# EAGLE board OOBD - BTM182-BTM222 - V5 - EuroPCB (EAGLE 5.11), part 1 of 3
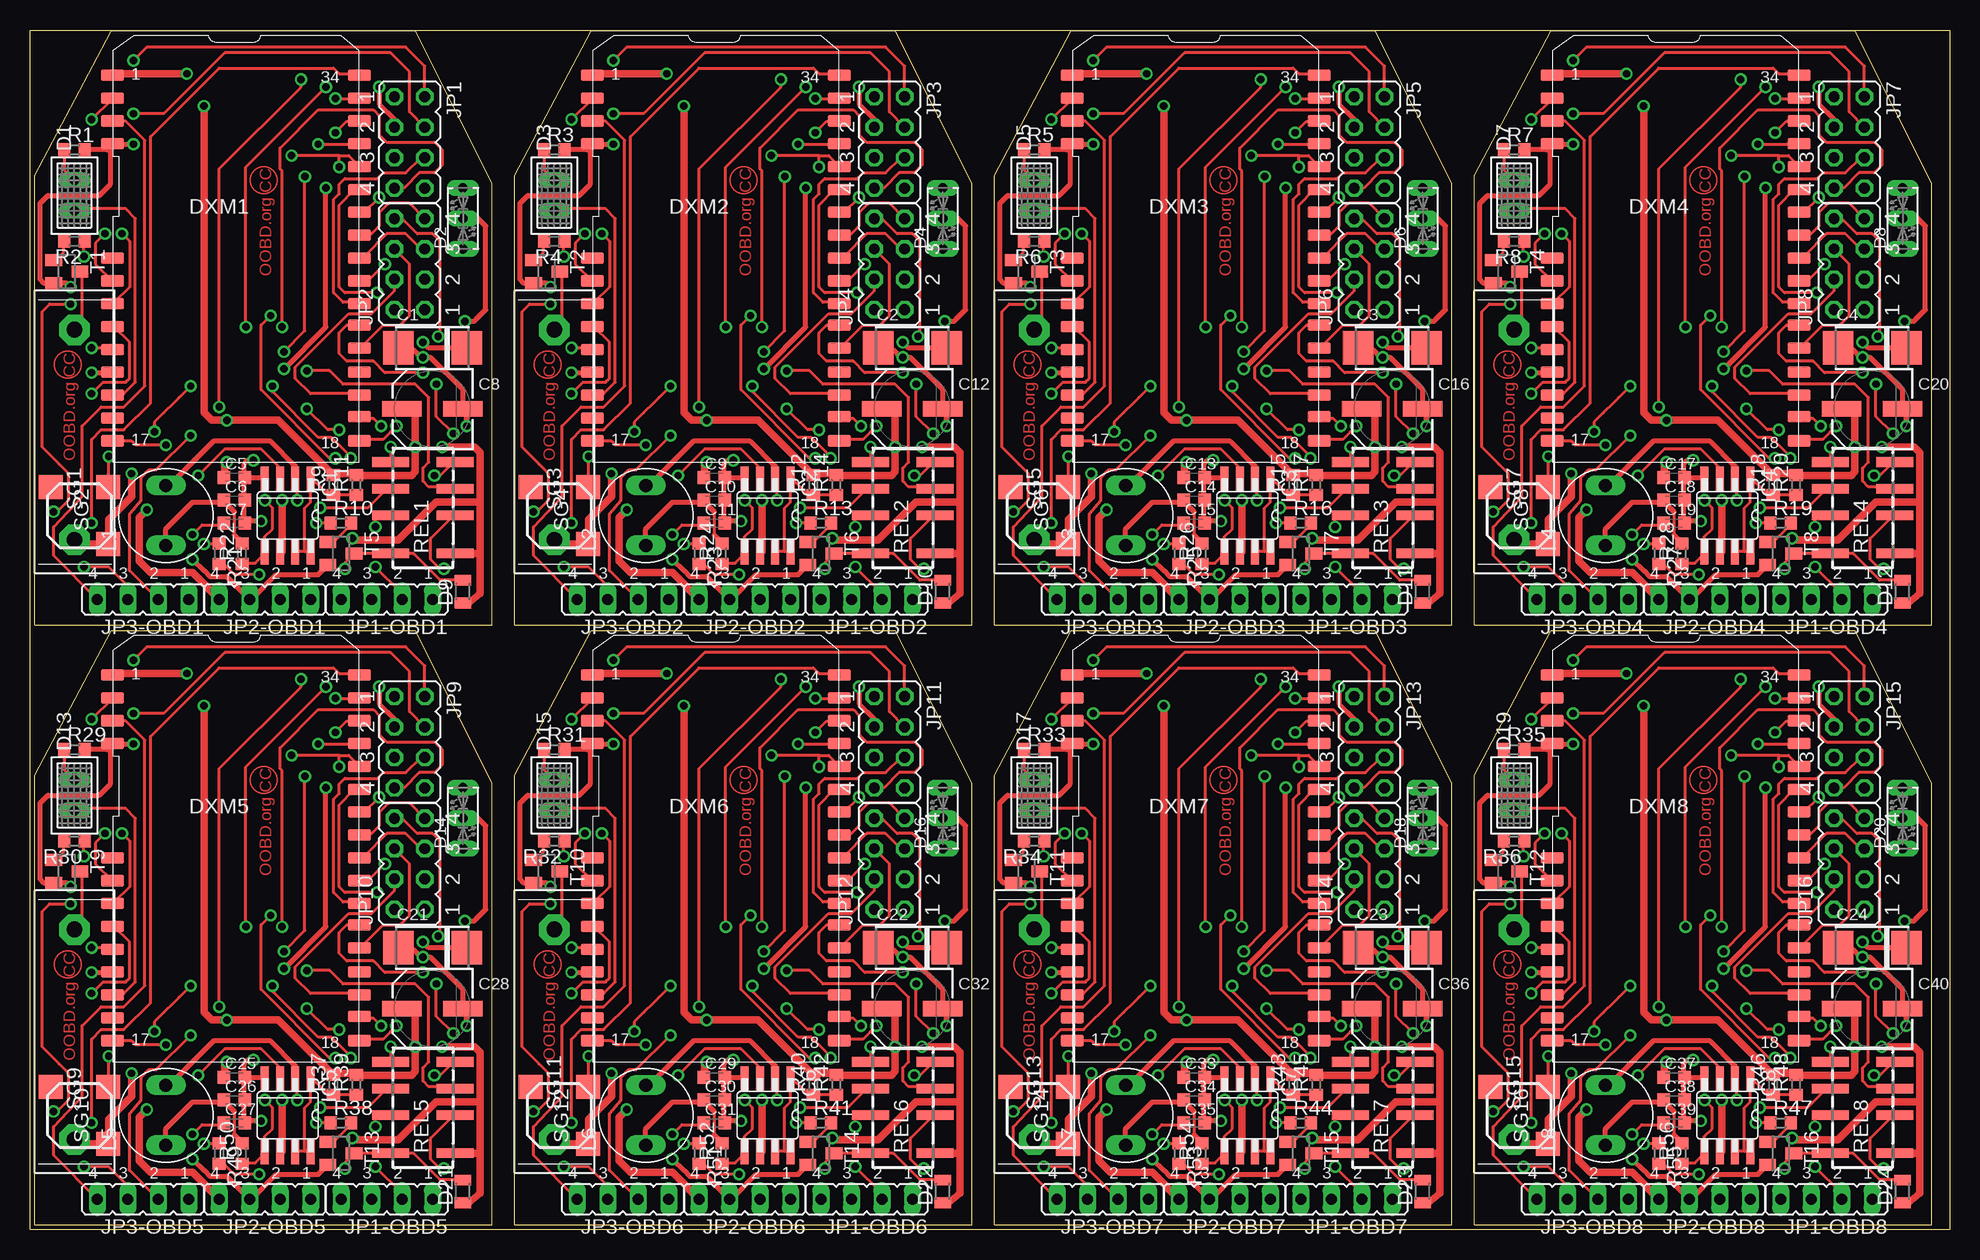
[diagram p0: board, top side]
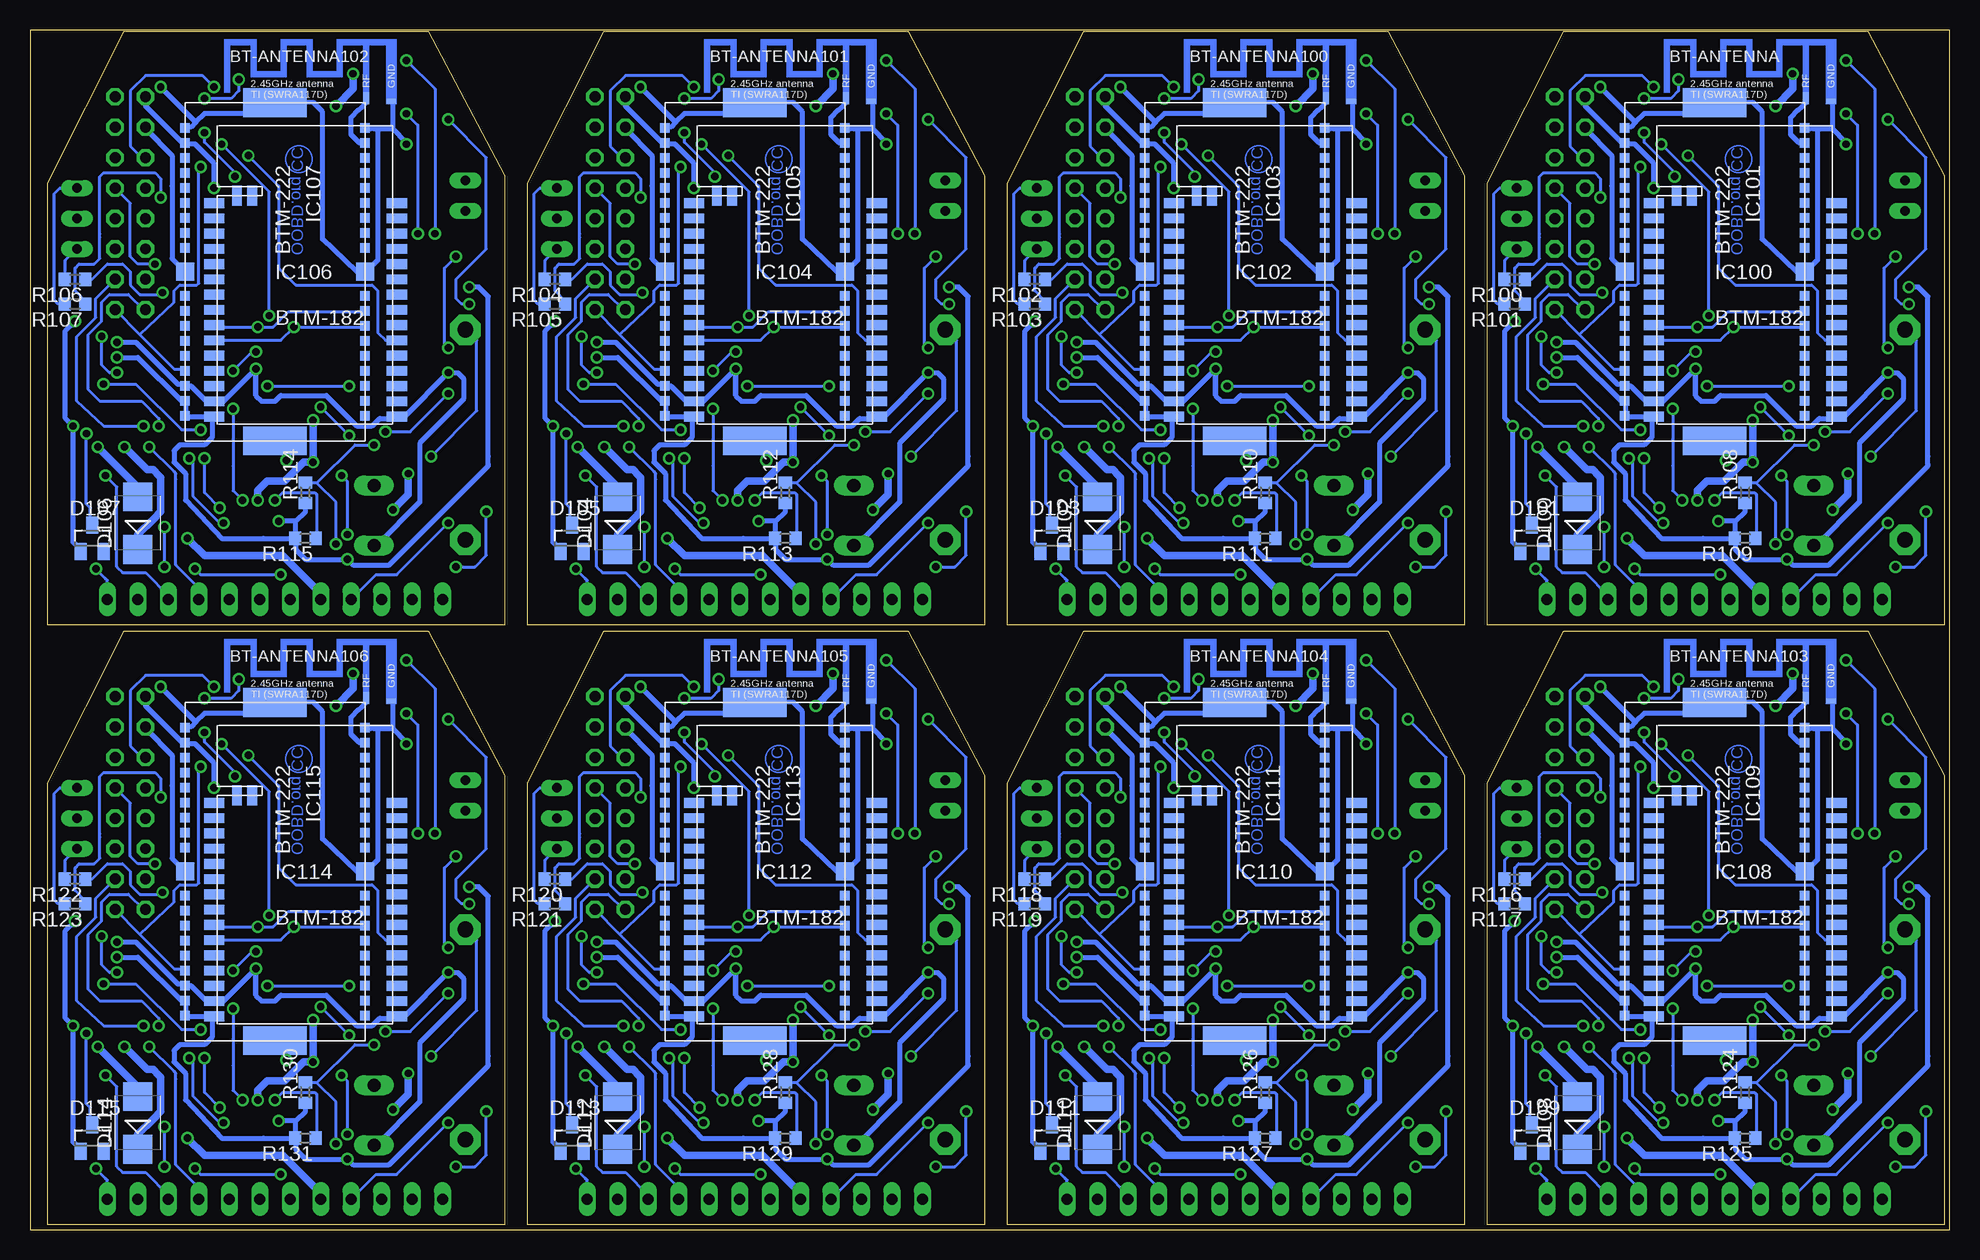
[diagram p1: board, bottom side, seen from below]

Size 160 x 100 mm. Coordinates in mm from the lower left corner, seen from the top.
Outline: 0.41,50.38 38.5,50.38 38.5,87.22 32.15,99.91
Outline: 0.4,50.39 0.4,87.85
Outline: 0.41,87.85 6.75,99.91 32.14,99.91
Outline: 0.41,0.38 38.5,0.38 38.5,37.22 32.15,49.91
Outline: 0.4,0.39 0.4,37.85
Outline: 0.41,37.85 6.75,49.91 32.14,49.91
Outline: 40.41,50.38 78.5,50.38 78.5,87.22 72.15,99.91
Outline: 40.4,50.39 40.4,87.85
Outline: 40.41,87.85 46.75,99.91 72.14,99.91
Outline: 80.41,50.38 118.5,50.38 118.5,87.22 112.15,99.91
Outline: 80.4,50.39 80.4,87.85
Outline: 80.41,87.85 86.75,99.91 112.14,99.91
Outline: 120.41,50.38 158.5,50.38 158.5,87.22 152.15,99.91
Outline: 120.4,50.39 120.4,87.85
Outline: 120.41,87.85 126.75,99.91 152.14,99.91
Outline: 40.41,0.38 78.5,0.38 78.5,37.22 72.15,49.91
Outline: 40.4,0.39 40.4,37.85
Outline: 40.41,37.85 46.75,49.91 72.14,49.91
Outline: 80.41,0.38 118.5,0.38 118.5,37.22 112.15,49.91
Outline: 80.4,0.39 80.4,37.85
Outline: 80.41,37.85 86.75,49.91 112.14,49.91
Outline: 120.41,0.38 158.5,0.38 158.5,37.22 152.15,49.91
Outline: 120.4,0.39 120.4,37.85
Outline: 120.41,37.85 126.75,49.91 152.14,49.91
Outline: 0,100 160,100 160,0 0,0 0,100
Copper layers (1*16): Top 0.035mm / dielectric 1.5mm / Bottom 0.035mm
Design rules "default *": minimum track width 10mil, minimum drill 24mil, track to track 8mil, track to pad 8mil, pad to pad 8mil, via to via 8mil, smd to smd 8mil, copper to edge 12mil, drill to drill 8mil, minimum pad ring 10mil, minimum via ring 8mil, stop-mask expansion 4mil, vias tented up to drill 0mil, thermal gap 10mil

## Footprints (pad centres in the part's own frame; a part is rotated, then mirrored left to right if it is on the bottom)
SWRA117D_RIGHT = smd 0.813 x 0.406: GND -0.45,0.25 | smd 0.508 x 1.016: RF -2.55,0.5
C6032-TE-C = smd 2.54 x 2.794: + 2.857,0; - -2.857,0
C0603K = smd 1.05 x 1.08: 1 -0.875,0; 2 0.875,0
SV-D = smd 3.302 x 1.27: + -2.54,0; - 2.54,0
U57X32 = drill 0.813 long: A -1.27,0; K 1.27,0
DUOLED2X5 = drill 0.813 long: AG -2.54,0; AR 2.54,0; K 0,0
MICROMELF-W = smd 0.9 x 1.4: A 0.95,0; C -0.95,0
SMB = smd 2.4 x 2.4: A 2.2,0; C -2.2,0
SOT23 = smd 1 x 1.4: 1 -0.95,-1.1; 2 0.95,-1.1; 3 0,1.1
DMX1-MINI = smd 1.93 x 0.965: 1 0,32.258; 2 0,30.353; 3 0,28.448; 4 0,26.543; 9 0,17.018; 10 0,15.113; 11 0,13.208; 12 0,11.303; 13 0,9.398; 14 0,7.493; 15 0,5.588; 16 0,3.683; 17 0,1.778; 18 20.574,1.778; 19 20.574,3.81; 20 20.574,5.588; 21 20.574,7.493; 22 20.574,9.525; 23 20.574,11.43; 24 20.574,13.208; 25 20.574,15.113; 26 20.574,17.018; 27 20.574,18.923; 28 20.574,20.828; 29 20.574,22.733; 30 20.574,24.638; 31 20.574,26.543; 32 20.574,28.448; 33 20.574,30.353; 34 20.574,32.258
SO8 = smd 0.66 x 2.032: 1 -1.905,-3.073; 2 -0.635,-3.073; 3 0.635,-3.073; 4 1.905,-3.073; 5 1.905,3.073; 6 0.635,3.073; 7 -0.635,3.073; 8 -1.905,3.073
BTM-182 = smd 1.676 x 0.813: P$1 -7.62,7.62; P$2 -7.62,6.35; P$3 -7.62,5.08; P$4 -7.62,3.81; P$5 -7.62,2.54; P$6 -7.62,1.27; P$7 -7.62,0; P$8 -7.62,-1.27; P$9 -7.62,-2.54; P$10 -7.62,-3.81; P$11 -7.62,-5.08; P$12 -7.62,-6.35; P$13 -7.62,-7.62; P$14 -7.62,-8.89; P$15 -7.62,-10.16; P$16 7.62,-10.16; P$17 7.62,-8.89; P$18 7.62,-7.62; P$19 7.62,-6.35; P$20 7.62,-5.08; P$21 7.62,-3.81; P$22 7.62,-2.54; P$23 7.62,-1.27; P$24 7.62,0; P$25 7.62,1.27; P$26 7.62,2.54; P$27 7.62,3.81; P$28 7.62,5.08; P$29 7.62,6.35; P$30 7.62,7.62 | smd 0.813 x 1.676: P$31 -4.445,8.255; P$32 -5.715,8.255
BTM-222 = smd 0.8 x 0.8: P$1 -12.635,-7.5; P$2 -11.385,-7.5; P$3 -10.135,-7.5; P$4 -8.885,-7.5; P$5 -7.635,-7.5; P$6 -6.385,-7.5; P$7 -5.135,-7.5; P$8 -3.885,-7.5; P$9 -2.635,-7.5; P$11 1.365,-7.5; P$12 2.615,-7.5; P$13 3.865,-7.5; P$14 5.115,-7.5; P$15 6.365,-7.5; P$16 7.615,-7.5; P$17 8.865,-7.5; P$18 10.115,-7.5; P$19 11.365,-7.5; P$20 11.365,7.5; P$21 10.115,7.5; P$22 8.865,7.5; P$23 7.615,7.5; P$24 6.365,7.5; P$25 5.115,7.5; P$26 3.865,7.5; P$27 2.615,7.5; P$28 1.365,7.5; P$30 -2.635,7.5; P$31 -3.885,7.5; P$32 -5.135,7.5; P$33 -6.385,7.5; P$34 -7.635,7.5; P$35 -8.885,7.5; P$36 -10.135,7.5; P$37 -11.385,7.5; P$38 -12.635,7.5 | smd 1.5 x 1.5: P$10 -0.635,-7.5; P$29 -0.635,7.5 | smd 2.4 x 5.3: P$AGND -14.735,0; P$BGND 13.465,0
JP4Q = drill 0.914 octagon: 1 -3.81,-1.27; 2 -3.81,1.27; 3 -1.27,-1.27; 4 -1.27,1.27; 5 1.27,-1.27; 6 1.27,1.27; 7 3.81,-1.27; 8 3.81,1.27
JP4 = drill 0.914 long: 1 -3.81,0; 2 -1.27,0; 3 1.27,0; 4 3.81,0
07HCP-XXXX-50 = drill 1.1 long: 1 -2.5,0; 2 2.5,0
R0603 = smd 1 x 1.1: 1 -0.85,0; 2 0.85,0
FTR-B4GA = smd 0.8 x 3.1: 1 -3.8,-3.167; 2 -0.625,-3.167; 3 1.597,-3.167; 4 3.82,-3.167; 5 3.82,2.23; 6 1.597,2.23; 7 -0.625,2.23; 8 -3.8,2.23
PMB24F/V = drill 1.321 pad 2.54 octagon: 1 -9.004,0; 2 8.504,0
BME0603SA = smd 2 x 2: (+)LEAD 4.295,0.425; (-)LEAD -0.475,0.425; NC -0.475,-4.345

## Placement (x,y rotation side)
BT-ANTENNA  [SWRA117D_RIGHT]  9.42,93.81 0 bottom
BT-ANTENNA100  [SWRA117D_RIGHT]  49.42,93.81 0 bottom
BT-ANTENNA101  [SWRA117D_RIGHT]  89.42,93.81 0 bottom
BT-ANTENNA102  [SWRA117D_RIGHT]  129.42,93.81 0 bottom
BT-ANTENNA103  [SWRA117D_RIGHT]  9.42,43.81 0 bottom
BT-ANTENNA104  [SWRA117D_RIGHT]  49.42,43.81 0 bottom
BT-ANTENNA105  [SWRA117D_RIGHT]  89.42,43.81 0 bottom
BT-ANTENNA106  [SWRA117D_RIGHT]  129.42,43.81 0 bottom
C1  220µF/6V  [C6032-TE-C]  33.55,73.5 0 top
C2  220µF/6V  [C6032-TE-C]  73.55,73.5 0 top
C3  220µF/6V  [C6032-TE-C]  113.55,73.5 0 top
C4  220µF/6V  [C6032-TE-C]  153.55,73.5 0 top
C5  100nF  [C0603K]  17.04,62.7 0 top
C6  1µF  [C0603K]  17.04,60.8 0 top
C7  470pF  [C0603K]  17.04,58.89 0 top
C8  47µ/35V  [SV-D]  33.55,68.41 0 top
C9  100nF  [C0603K]  57.04,62.7 0 top
C10  1µF  [C0603K]  57.04,60.8 0 top
C11  470pF  [C0603K]  57.04,58.89 0 top
C12  47µ/35V  [SV-D]  73.55,68.41 0 top
C13  100nF  [C0603K]  97.04,62.7 0 top
C14  1µF  [C0603K]  97.04,60.8 0 top
C15  470pF  [C0603K]  97.04,58.89 0 top
C16  47µ/35V  [SV-D]  113.55,68.41 0 top
C17  100nF  [C0603K]  137.04,62.7 0 top
C18  1µF  [C0603K]  137.04,60.8 0 top
C19  470pF  [C0603K]  137.04,58.89 0 top
C20  47µ/35V  [SV-D]  153.55,68.41 0 top
C21  220µF/6V  [C6032-TE-C]  33.55,23.5 0 top
C22  220µF/6V  [C6032-TE-C]  73.55,23.5 0 top
C23  220µF/6V  [C6032-TE-C]  113.55,23.5 0 top
C24  220µF/6V  [C6032-TE-C]  153.55,23.5 0 top
C25  100nF  [C0603K]  17.04,12.7 0 top
C26  1µF  [C0603K]  17.04,10.79 0 top
C27  470pF  [C0603K]  17.04,8.89 0 top
C28  47µ/35V  [SV-D]  33.55,18.41 0 top
C29  100nF  [C0603K]  57.04,12.7 0 top
C30  1µF  [C0603K]  57.04,10.79 0 top
C31  470pF  [C0603K]  57.04,8.89 0 top
C32  47µ/35V  [SV-D]  73.55,18.41 0 top
C33  100nF  [C0603K]  97.04,12.7 0 top
C34  1µF  [C0603K]  97.04,10.79 0 top
C35  470pF  [C0603K]  97.04,8.89 0 top
C36  47µ/35V  [SV-D]  113.55,18.41 0 top
C37  100nF  [C0603K]  137.04,12.7 0 top
C38  1µF  [C0603K]  137.04,10.79 0 top
C39  470pF  [C0603K]  137.04,8.89 0 top
C40  47µ/35V  [SV-D]  153.55,18.41 0 top
D1  U57X32  [U57X32]  3.71,86.19 90 top
D2  [DUOLED2X5]  36.09,84.29 90 top
D3  U57X32  [U57X32]  43.7,86.19 90 top
D4  [DUOLED2X5]  76.09,84.29 90 top
D5  U57X32  [U57X32]  83.7,86.19 90 top
D6  [DUOLED2X5]  116.09,84.29 90 top
D7  U57X32  [U57X32]  123.7,86.19 90 top
D8  [DUOLED2X5]  156.09,84.29 90 top
D9  1N4148  [MICROMELF-W]  36.09,53.17 90 top
D10  1N4148  [MICROMELF-W]  76.09,53.17 90 top
D11  1N4148  [MICROMELF-W]  116.09,53.17 90 top
D12  1N4148  [MICROMELF-W]  156.09,53.17 90 top
D13  U57X32  [U57X32]  3.71,36.2 90 top
D14  [DUOLED2X5]  36.09,34.29 90 top
D15  U57X32  [U57X32]  43.7,36.2 90 top
D16  [DUOLED2X5]  76.09,34.29 90 top
D17  U57X32  [U57X32]  83.7,36.2 90 top
D18  [DUOLED2X5]  116.09,34.29 90 top
D19  U57X32  [U57X32]  123.7,36.2 90 top
D20  [DUOLED2X5]  156.09,34.29 90 top
D21  1N4148  [MICROMELF-W]  36.09,3.18 90 top
D22  1N4148  [MICROMELF-W]  76.09,3.18 90 top
D23  1N4148  [MICROMELF-W]  116.09,3.18 90 top
D24  1N4148  [MICROMELF-W]  156.09,3.18 90 top
D100  B140  [SMB]  31.01,58.89 90 bottom
D101  BAS40  [SOT23]  34.82,57.62 0 bottom
D102  B140  [SMB]  71.01,58.89 90 bottom
D103  BAS40  [SOT23]  74.82,57.62 0 bottom
D104  B140  [SMB]  111.01,58.89 90 bottom
D105  BAS40  [SOT23]  114.82,57.62 0 bottom
D106  B140  [SMB]  151.01,58.89 90 bottom
D107  BAS40  [SOT23]  154.82,57.62 0 bottom
D108  B140  [SMB]  31.01,8.89 90 bottom
D109  BAS40  [SOT23]  34.82,7.62 0 bottom
D110  B140  [SMB]  71.01,8.89 90 bottom
D111  BAS40  [SOT23]  74.82,7.62 0 bottom
D112  B140  [SMB]  111.01,8.89 90 bottom
D113  BAS40  [SOT23]  114.82,7.62 0 bottom
D114  B140  [SMB]  151.01,8.89 90 bottom
D115  BAS40  [SOT23]  154.82,7.62 0 bottom
DXM1  IC1  [DMX1-MINI]  6.88,63.97 0 top
DXM2  IC1  [DMX1-MINI]  46.88,63.97 0 top
DXM3  IC1  [DMX1-MINI]  86.88,63.97 0 top
DXM4  IC1  [DMX1-MINI]  126.88,63.97 0 top
DXM5  IC1  [DMX1-MINI]  6.88,13.97 0 top
DXM6  IC1  [DMX1-MINI]  46.88,13.97 0 top
DXM7  IC1  [DMX1-MINI]  86.88,13.97 0 top
DXM8  IC1  [DMX1-MINI]  126.88,13.97 0 top
IC1  MC34063-SO  [SO8]  21.48,59.52 180 top
IC2  MC34063-SO  [SO8]  61.48,59.52 180 top
IC3  MC34063-SO  [SO8]  101.48,59.52 180 top
IC4  MC34063-SO  [SO8]  141.49,59.52 180 top
IC5  MC34063-SO  [SO8]  21.48,9.53 180 top
IC6  MC34063-SO  [SO8]  61.48,9.53 180 top
IC7  MC34063-SO  [SO8]  101.48,9.53 180 top
IC8  MC34063-SO  [SO8]  141.49,9.53 180 top
IC100  BTM-182  [BTM-182]  17.04,77.94 0 bottom
IC101  BTM-222  [BTM-222]  19.58,79.21 270 bottom
IC102  BTM-182  [BTM-182]  57.04,77.94 0 bottom
IC103  BTM-222  [BTM-222]  59.58,79.21 270 bottom
IC104  BTM-182  [BTM-182]  97.04,77.94 0 bottom
IC105  BTM-222  [BTM-222]  99.58,79.21 270 bottom
IC106  BTM-182  [BTM-182]  137.04,77.94 0 bottom
IC107  BTM-222  [BTM-222]  139.58,79.21 270 bottom
IC108  BTM-182  [BTM-182]  17.04,27.94 0 bottom
IC109  BTM-222  [BTM-222]  19.58,29.21 270 bottom
IC110  BTM-182  [BTM-182]  57.04,27.94 0 bottom
IC111  BTM-222  [BTM-222]  59.58,29.21 270 bottom
IC112  BTM-182  [BTM-182]  97.04,27.94 0 bottom
IC113  BTM-222  [BTM-222]  99.58,29.21 270 bottom
IC114  BTM-182  [BTM-182]  137.04,27.94 0 bottom
IC115  BTM-222  [BTM-222]  139.58,29.21 270 bottom
JP1  Programm  [JP4Q]  31.64,90.64 270 top
JP1-OBD1  [JP4]  29.74,52.54 180 top
JP1-OBD2  [JP4]  69.74,52.54 180 top
JP1-OBD3  [JP4]  109.74,52.54 180 top
JP1-OBD4  [JP4]  149.74,52.54 180 top
JP1-OBD5  [JP4]  29.74,2.54 180 top
JP1-OBD6  [JP4]  69.74,2.54 180 top
JP1-OBD7  [JP4]  109.74,2.54 180 top
JP1-OBD8  [JP4]  149.74,2.54 180 top
JP2  SPI / SD-Card  [JP4Q]  31.64,80.48 90 top
JP2-OBD1  [JP4]  19.58,52.54 180 top
JP2-OBD2  [JP4]  59.58,52.54 180 top
JP2-OBD3  [JP4]  99.58,52.54 180 top
JP2-OBD4  [JP4]  139.58,52.54 180 top
JP2-OBD5  [JP4]  19.58,2.54 180 top
JP2-OBD6  [JP4]  59.58,2.54 180 top
JP2-OBD7  [JP4]  99.58,2.54 180 top
JP2-OBD8  [JP4]  139.58,2.54 180 top
JP3  Programm  [JP4Q]  71.64,90.64 270 top
JP3-OBD1  [JP4]  9.42,52.54 180 top
JP3-OBD2  [JP4]  49.42,52.54 180 top
JP3-OBD3  [JP4]  89.42,52.54 180 top
JP3-OBD4  [JP4]  129.42,52.54 180 top
JP3-OBD5  [JP4]  9.42,2.54 180 top
JP3-OBD6  [JP4]  49.42,2.54 180 top
JP3-OBD7  [JP4]  89.42,2.54 180 top
JP3-OBD8  [JP4]  129.42,2.54 180 top
JP4  SPI / SD-Card  [JP4Q]  71.64,80.48 90 top
JP5  Programm  [JP4Q]  111.64,90.64 270 top
JP6  SPI / SD-Card  [JP4Q]  111.64,80.48 90 top
JP7  Programm  [JP4Q]  151.65,90.64 270 top
JP8  SPI / SD-Card  [JP4Q]  151.65,80.48 90 top
JP9  Programm  [JP4Q]  31.64,40.64 270 top
JP10  SPI / SD-Card  [JP4Q]  31.64,30.48 90 top
JP11  Programm  [JP4Q]  71.64,40.64 270 top
JP12  SPI / SD-Card  [JP4Q]  71.64,30.48 90 top
JP13  Programm  [JP4Q]  111.64,40.64 270 top
JP14  SPI / SD-Card  [JP4Q]  111.64,30.48 90 top
JP15  Programm  [JP4Q]  151.65,40.64 270 top
JP16  SPI / SD-Card  [JP4Q]  151.65,30.48 90 top
L1  220µH  [07HCP-XXXX-50]  11.32,59.52 90 top
L2  220µH  [07HCP-XXXX-50]  51.33,59.52 90 top
L3  220µH  [07HCP-XXXX-50]  91.33,59.52 90 top
L4  220µH  [07HCP-XXXX-50]  131.32,59.52 90 top
L5  220µH  [07HCP-XXXX-50]  11.32,9.53 90 top
L6  220µH  [07HCP-XXXX-50]  51.33,9.53 90 top
L7  220µH  [07HCP-XXXX-50]  91.33,9.53 90 top
L8  220µH  [07HCP-XXXX-50]  131.32,9.53 90 top
R1  120R  [R0603]  3.71,90 0 top
R2  4K7  [R0603]  3.71,82.38 180 top
R3  120R  [R0603]  43.7,90 0 top
R4  4K7  [R0603]  43.7,82.38 180 top
R5  120R  [R0603]  83.7,90 0 top
R6  4K7  [R0603]  83.7,82.38 180 top
R7  120R  [R0603]  123.7,90 0 top
R8  4K7  [R0603]  123.7,82.38 180 top
R9  1R  [R0603]  25.3,62.06 90 top
R10  4K7  [R0603]  25.93,58.89 0 top
R11  1R  [R0603]  27.2,62.06 90 top
R12  1R  [R0603]  65.3,62.06 90 top
R13  4K7  [R0603]  65.93,58.89 0 top
R14  1R  [R0603]  67.2,62.06 90 top
R15  1R  [R0603]  105.3,62.06 90 top
R16  4K7  [R0603]  105.93,58.89 0 top
R17  1R  [R0603]  107.2,62.06 90 top
R18  1R  [R0603]  145.29,62.06 90 top
R19  4K7  [R0603]  145.93,58.89 0 top
R20  1R  [R0603]  147.2,62.06 90 top
R21  180k  [R0603]  15.77,56.35 270 top
R22  1K6  [R0603]  17.68,56.35 90 top
R23  180k  [R0603]  55.77,56.35 270 top
R24  1K6  [R0603]  57.67,56.35 90 top
R25  180k  [R0603]  95.77,56.35 270 top
R26  1K6  [R0603]  97.67,56.35 90 top
R27  180k  [R0603]  135.77,56.35 270 top
R28  1K6  [R0603]  137.68,56.35 90 top
R29  120R  [R0603]  3.71,40 0 top
R30  4K7  [R0603]  3.71,32.38 180 top
R31  120R  [R0603]  43.7,40 0 top
R32  4K7  [R0603]  43.7,32.38 180 top
R33  120R  [R0603]  83.7,40 0 top
R34  4K7  [R0603]  83.7,32.38 180 top
R35  120R  [R0603]  123.7,40 0 top
R36  4K7  [R0603]  123.7,32.38 180 top
R37  1R  [R0603]  25.3,12.06 90 top
R38  4K7  [R0603]  25.93,8.89 0 top
R39  1R  [R0603]  27.2,12.06 90 top
R40  1R  [R0603]  65.3,12.06 90 top
R41  4K7  [R0603]  65.93,8.89 0 top
R42  1R  [R0603]  67.2,12.06 90 top
R43  1R  [R0603]  105.3,12.06 90 top
R44  4K7  [R0603]  105.93,8.89 0 top
R45  1R  [R0603]  107.2,12.06 90 top
R46  1R  [R0603]  145.29,12.06 90 top
R47  4K7  [R0603]  145.93,8.89 0 top
R48  1R  [R0603]  147.2,12.06 90 top
R49  180k  [R0603]  15.77,6.35 270 top
R50  1K6  [R0603]  17.68,6.35 90 top
R51  180k  [R0603]  55.77,6.35 270 top
R52  1K6  [R0603]  57.67,6.35 90 top
R53  180k  [R0603]  95.77,6.35 270 top
R54  1K6  [R0603]  97.67,6.35 90 top
R55  180k  [R0603]  135.77,6.35 270 top
R56  1K6  [R0603]  137.68,6.35 90 top
R100  100R  [R0603]  36.25,79.21 180 bottom
R101  100R  [R0603]  36.25,77.15 180 bottom
R102  100R  [R0603]  76.25,79.21 180 bottom
R103  100R  [R0603]  76.25,77.15 180 bottom
R104  100R  [R0603]  116.25,79.21 180 bottom
R105  100R  [R0603]  116.25,77.15 180 bottom
R106  100R  [R0603]  156.25,79.21 180 bottom
R107  100R  [R0603]  156.25,77.15 180 bottom
R108  47k  [R0603]  17.04,61.43 90 bottom
R109  1K  [R0603]  17.04,57.62 180 bottom
R110  47k  [R0603]  57.04,61.43 90 bottom
R111  1K  [R0603]  57.04,57.62 180 bottom
R112  47k  [R0603]  97.04,61.43 90 bottom
R113  1K  [R0603]  97.04,57.62 180 bottom
R114  47k  [R0603]  137.04,61.43 90 bottom
R115  1K  [R0603]  137.04,57.62 180 bottom
R116  100R  [R0603]  36.25,29.21 180 bottom
R117  100R  [R0603]  36.25,27.15 180 bottom
R118  100R  [R0603]  76.25,29.21 180 bottom
R119  100R  [R0603]  76.25,27.15 180 bottom
R120  100R  [R0603]  116.25,29.21 180 bottom
R121  100R  [R0603]  116.25,27.15 180 bottom
R122  100R  [R0603]  156.25,29.21 180 bottom
R123  100R  [R0603]  156.25,27.15 180 bottom
R124  47k  [R0603]  17.04,11.43 90 bottom
R125  1K  [R0603]  17.04,7.62 180 bottom
R126  47k  [R0603]  57.04,11.43 90 bottom
R127  1K  [R0603]  57.04,7.62 180 bottom
R128  47k  [R0603]  97.04,11.43 90 bottom
R129  1K  [R0603]  97.04,7.62 180 bottom
R130  47k  [R0603]  137.04,11.43 90 bottom
R131  1K  [R0603]  137.04,7.62 180 bottom
REL1  FTR-B4GA  [FTR-B4GA]  32.28,60.16 90 top
REL2  FTR-B4GA  [FTR-B4GA]  72.28,60.16 90 top
REL3  FTR-B4GA  [FTR-B4GA]  112.28,60.16 90 top
REL4  FTR-B4GA  [FTR-B4GA]  152.28,60.16 90 top
REL5  FTR-B4GA  [FTR-B4GA]  32.28,10.16 90 top
REL6  FTR-B4GA  [FTR-B4GA]  72.28,10.16 90 top
REL7  FTR-B4GA  [FTR-B4GA]  112.28,10.16 90 top
REL8  FTR-B4GA  [FTR-B4GA]  152.28,10.16 90 top
SG1  PMB24FV  [PMB24F/V]  3.71,66.51 90 top
SG2  MBWOE  [BME0603SA]  6.09,61.43 270 top
SG3  PMB24FV  [PMB24F/V]  43.7,66.51 90 top
SG4  MBWOE  [BME0603SA]  46.09,61.43 270 top
SG5  PMB24FV  [PMB24F/V]  83.7,66.51 90 top
SG6  MBWOE  [BME0603SA]  86.09,61.43 270 top
SG7  PMB24FV  [PMB24F/V]  123.7,66.51 90 top
SG8  MBWOE  [BME0603SA]  126.09,61.43 270 top
SG9  PMB24FV  [PMB24F/V]  3.71,16.51 90 top
SG10  MBWOE  [BME0603SA]  6.09,11.43 270 top
SG11  PMB24FV  [PMB24F/V]  43.7,16.51 90 top
SG12  MBWOE  [BME0603SA]  46.09,11.43 270 top
SG13  PMB24FV  [PMB24F/V]  83.7,16.51 90 top
SG14  MBWOE  [BME0603SA]  86.09,11.43 270 top
SG15  PMB24FV  [PMB24F/V]  123.7,16.51 90 top
SG16  MBWOE  [BME0603SA]  126.09,11.43 270 top
T1  BC847  [SOT23]  3.07,79.84 270 top
T2  BC847  [SOT23]  43.07,79.84 270 top
T3  BC847  [SOT23]  83.07,79.84 270 top
T4  BC847  [SOT23]  123.07,79.84 270 top
T5  BC847  [SOT23]  25.93,56.35 270 top
T6  BC847  [SOT23]  65.93,56.35 270 top
T7  BC847  [SOT23]  105.93,56.35 270 top
T8  BC847  [SOT23]  145.93,56.35 270 top
T9  BC847  [SOT23]  3.07,29.84 270 top
T10  BC847  [SOT23]  43.07,29.84 270 top
T11  BC847  [SOT23]  83.07,29.84 270 top
T12  BC847  [SOT23]  123.07,29.84 270 top
T13  BC847  [SOT23]  25.93,6.35 270 top
T14  BC847  [SOT23]  65.93,6.35 270 top
T15  BC847  [SOT23]  105.93,6.35 270 top
T16  BC847  [SOT23]  145.93,6.35 270 top

## Library data of the parts
BT-ANTENNA BT-ANTENNA100-BT-ANTENNA106 = ant-planar-1
C1-C4 C21-C24 = rc-master
C5-C7 C9-C11 C13-C15 C17-C19 C25-C27 C29-C31 C33-C35 C37-C39 R1-R56 R100-R131 = rcl
C8 C12 C16 C20 C28 C32 C36 C40 = cap-master
D1-D8 D13-D20 = led
D9-D12 D21-D24 D100-D115 = diode
DXM1-DXM8 = DXM
IC1-IC8 = mc34063
IC100 IC102 IC104 IC106 IC108 IC110 IC112 IC114 = BTM182
IC101 IC103 IC105 IC107 IC109 IC111 IC113 IC115 = btm-222
JP1 JP1-OBD1-JP1-OBD8 JP2 JP2-OBD1-JP2-OBD8 JP3 JP3-OBD1-JP3-OBD8 JP4-JP16 = jumper
L1-L8 = Inductor-Fastron
REL1-REL8 = relay; MN: Fujitsu; MPN: FTR-B4GAxxxZ; OC_REICHELT: FTR-B4GA 12V
SG1 SG3 SG5 SG7 SG9 SG11 SG13 SG15 = buzzer; OC_CONRAD: Best.-Nr.: 752223 - 62 [Teilenummer: 185110]
SG2 SG4 SG6 SG8 SG10 SG12 SG14 SG16 = buzzer; MF: Grewus
T1-T16 = transistor

## Nets
3V3OUT: DXM1.9
3V3OUT1: DXM5.9
3V3OUT2: DXM2.9
3V3OUT3: DXM3.9
3V3OUT4: DXM4.9
3V3OUT5: DXM6.9
3V3OUT6: DXM7.9
3V3OUT7: DXM8.9
12V_DOUT: C5.1 C8.+ D100.C DXM1.1 IC1.6 R9.2 R11.2
12V_DOUT1: C25.1 C28.+ D108.C DXM5.1 IC5.6 R37.2 R39.2
12V_DOUT2: C9.1 C12.+ D102.C DXM2.1 IC2.6 R12.2 R14.2
12V_DOUT3: C13.1 C16.+ D104.C DXM3.1 IC3.6 R15.2 R17.2
12V_DOUT4: C17.1 C20.+ D106.C DXM4.1 IC4.6 R18.2 R20.2
12V_DOUT5: C29.1 C32.+ D110.C DXM6.1 IC6.6 R40.2 R42.2
12V_DOUT6: C33.1 C36.+ D112.C DXM7.1 IC7.6 R43.2 R45.2
12V_DOUT7: C37.1 C40.+ D114.C DXM8.1 IC8.6 R46.2 R48.2
+3V1: C21.+ C26.1 DXM5.14 IC108.P$14 IC108.P$16 IC109.P$2 IC109.P$17 JP9.1 L5.1 R50.2
+3V2: C2.+ C10.1 DXM2.14 IC102.P$14 IC102.P$16 IC103.P$2 IC103.P$17 JP3.1 L2.1 R24.2
+3V3: C1.+ C6.1 DXM1.14 IC100.P$14 IC100.P$16 IC101.P$2 IC101.P$17 JP1.1 L1.1 R22.2
+3V4: C3.+ C14.1 DXM3.14 IC104.P$14 IC104.P$16 IC105.P$2 IC105.P$17 JP5.1 L3.1 R26.2
+3V5: C4.+ C18.1 DXM4.14 IC106.P$14 IC106.P$16 IC107.P$2 IC107.P$17 JP7.1 L4.1 R28.2
+3V6: C22.+ C30.1 DXM6.14 IC110.P$14 IC110.P$16 IC111.P$2 IC111.P$17 JP11.1 L6.1 R52.2
+3V7: C23.+ C34.1 DXM7.14 IC112.P$14 IC112.P$16 IC113.P$2 IC113.P$17 JP13.1 L7.1 R54.2
+3V8: C24.+ C38.1 DXM8.14 IC114.P$14 IC114.P$16 IC115.P$2 IC115.P$17 JP15.1 L8.1 R56.2
+12V: D9.C D100.A JP2-OBD1.4 REL1.1 SG1.1 SG2.(+)LEAD
+12V1: D21.C D108.A JP2-OBD5.4 REL5.1 SG9.1 SG10.(+)LEAD
+12V2: D10.C D102.A JP2-OBD2.4 REL2.1 SG3.1 SG4.(+)LEAD
+12V3: D11.C D104.A JP2-OBD3.4 REL3.1 SG5.1 SG6.(+)LEAD
+12V4: D12.C D106.A JP2-OBD4.4 REL4.1 SG7.1 SG8.(+)LEAD
+12V5: D22.C D110.A JP2-OBD6.4 REL6.1 SG11.1 SG12.(+)LEAD
+12V6: D23.C D112.A JP2-OBD7.4 REL7.1 SG13.1 SG14.(+)LEAD
+12V7: D24.C D114.A JP2-OBD8.4 REL8.1 SG15.1 SG16.(+)LEAD
A0: DXM1.18 JP2.3
A1: DXM5.18 JP10.3
A2: DXM2.18 JP4.3
A3: DXM3.18 JP6.3
A4: DXM4.18 JP8.3
A5: DXM6.18 JP12.3
A6: DXM7.18 JP14.3
A7: DXM8.18 JP16.3
BOOT0: DXM1.10 JP1.2
BOOT1: DXM5.10 JP9.2
BOOT2: DXM2.10 JP3.2
BOOT3: DXM3.10 JP5.2
BOOT4: DXM4.10 JP7.2
BOOT5: DXM6.10 JP11.2
BOOT6: DXM7.10 JP13.2
BOOT7: DXM8.10 JP15.2
CS: DXM1.19 JP2.2
CS1: DXM5.19 JP10.2
CS2: DXM2.19 JP4.2
CS3: DXM3.19 JP6.2
CS4: DXM4.19 JP8.2
CS5: DXM6.19 JP12.2
CS6: DXM7.19 JP14.2
CS7: DXM8.19 JP16.2
CTS: DXM1.26 JP2.5
CTS1: DXM5.26 JP10.5
CTS2: DXM2.26 JP4.5
CTS3: DXM3.26 JP6.5
CTS4: DXM4.26 JP8.5
CTS5: DXM6.26 JP12.5
CTS6: DXM7.26 JP14.5
CTS7: DXM8.26 JP16.5
GND: BT-ANTENNA.GND C1.- C5.2 C6.2 C7.2 C8.- D2.K D101.1 DXM1.4 IC1.4 IC100.P$15 IC101.P$1 IC101.P$10 IC101.P$18 IC101.P$19 IC101.P$29 IC101.P$38 IC101.P$AGND IC101.P$BGND JP1.3 JP2-OBD1.3 R1.2 R108.1 R109.2 T1.2 T5.2
GND1: BT-ANTENNA103.GND C21.- C25.2 C26.2 C27.2 C28.- D14.K D109.1 DXM5.4 IC5.4 IC108.P$15 IC109.P$1 IC109.P$10 IC109.P$18 IC109.P$19 IC109.P$29 IC109.P$38 IC109.P$AGND IC109.P$BGND JP2-OBD5.3 JP9.3 R29.2 R124.1 R125.2 T9.2 T13.2
GND2: BT-ANTENNA100.GND C2.- C9.2 C10.2 C11.2 C12.- D4.K D103.1 DXM2.4 IC2.4 IC102.P$15 IC103.P$1 IC103.P$10 IC103.P$18 IC103.P$19 IC103.P$29 IC103.P$38 IC103.P$AGND IC103.P$BGND JP2-OBD2.3 JP3.3 R3.2 R110.1 R111.2 T2.2 T6.2
GND3: BT-ANTENNA101.GND C3.- C13.2 C14.2 C15.2 C16.- D6.K D105.1 DXM3.4 IC3.4 IC104.P$15 IC105.P$1 IC105.P$10 IC105.P$18 IC105.P$19 IC105.P$29 IC105.P$38 IC105.P$AGND IC105.P$BGND JP2-OBD3.3 JP5.3 R5.2 R112.1 R113.2 T3.2 T7.2
GND4: BT-ANTENNA102.GND C4.- C17.2 C18.2 C19.2 C20.- D8.K D107.1 DXM4.4 IC4.4 IC106.P$15 IC107.P$1 IC107.P$10 IC107.P$18 IC107.P$19 IC107.P$29 IC107.P$38 IC107.P$AGND IC107.P$BGND JP2-OBD4.3 JP7.3 R7.2 R114.1 R115.2 T4.2 T8.2
GND5: BT-ANTENNA104.GND C22.- C29.2 C30.2 C31.2 C32.- D16.K D111.1 DXM6.4 IC6.4 IC110.P$15 IC111.P$1 IC111.P$10 IC111.P$18 IC111.P$19 IC111.P$29 IC111.P$38 IC111.P$AGND IC111.P$BGND JP2-OBD6.3 JP11.3 R31.2 R126.1 R127.2 T10.2 T14.2
GND6: BT-ANTENNA105.GND C23.- C33.2 C34.2 C35.2 C36.- D18.K D113.1 DXM7.4 IC7.4 IC112.P$15 IC113.P$1 IC113.P$10 IC113.P$18 IC113.P$19 IC113.P$29 IC113.P$38 IC113.P$AGND IC113.P$BGND JP2-OBD7.3 JP13.3 R33.2 R128.1 R129.2 T11.2 T15.2
GND7: BT-ANTENNA106.GND C24.- C37.2 C38.2 C39.2 C40.- D20.K D115.1 DXM8.4 IC8.4 IC114.P$15 IC115.P$1 IC115.P$10 IC115.P$18 IC115.P$19 IC115.P$29 IC115.P$38 IC115.P$AGND IC115.P$BGND JP2-OBD8.3 JP15.3 R35.2 R130.1 R131.2 T12.2 T16.2
HS_CAN-H: JP1-OBD1.1 REL1.2
HS_CAN-H1: JP1-OBD5.1 REL5.2
HS_CAN-H2: JP1-OBD2.1 REL2.2
HS_CAN-H3: JP1-OBD3.1 REL3.2
HS_CAN-H4: JP1-OBD4.1 REL4.2
HS_CAN-H5: JP1-OBD6.1 REL6.2
HS_CAN-H6: JP1-OBD7.1 REL7.2
HS_CAN-H7: JP1-OBD8.1 REL8.2
HS_CAN-L: JP1-OBD1.2 REL1.7
HS_CAN-L1: JP1-OBD5.2 REL5.7
HS_CAN-L2: JP1-OBD2.2 REL2.7
HS_CAN-L3: JP1-OBD3.2 REL3.7
HS_CAN-L4: JP1-OBD4.2 REL4.7
HS_CAN-L5: JP1-OBD6.2 REL6.7
HS_CAN-L6: JP1-OBD7.2 REL7.7
HS_CAN-L7: JP1-OBD8.2 REL8.7
K-LINE: DXM1.33 JP3-OBD1.2
K-LINE1: DXM5.33 JP3-OBD5.2
K-LINE2: DXM2.33 JP3-OBD2.2
K-LINE3: DXM3.33 JP3-OBD3.2
K-LINE4: DXM4.33 JP3-OBD4.2
K-LINE5: DXM6.33 JP3-OBD6.2
K-LINE6: DXM7.33 JP3-OBD7.2
K-LINE7: DXM8.33 JP3-OBD8.2
L-LINE: DXM1.34 JP3-OBD1.1
L-LINE1: DXM5.34 JP3-OBD5.1
L-LINE2: DXM2.34 JP3-OBD2.1
L-LINE3: DXM3.34 JP3-OBD3.1
L-LINE4: DXM4.34 JP3-OBD4.1
L-LINE5: DXM6.34 JP3-OBD6.1
L-LINE6: DXM7.34 JP3-OBD7.1
L-LINE7: DXM8.34 JP3-OBD8.1
MISO: DXM1.22 JP2.6
MISO1: DXM5.22 JP10.6
MISO2: DXM2.22 JP4.6
MISO3: DXM3.22 JP6.6
MISO4: DXM4.22 JP8.6
MISO5: DXM6.22 JP12.6
MISO6: DXM7.22 JP14.6
MISO7: DXM8.22 JP16.6
MODE1: DXM1.29 R100.1
MODE2: DXM1.28 R101.1
MODE3: DXM5.28 R117.1
MODE4: DXM5.29 R116.1
MODE5: DXM2.28 R103.1
MODE6: DXM2.29 R102.1
MODE7: DXM3.28 R105.1
MODE8: DXM3.29 R104.1
MODE9: DXM4.28 R107.1
MODE10: DXM4.29 R106.1
MODE11: DXM6.28 R119.1
MODE12: DXM6.29 R118.1
MODE13: DXM7.28 R121.1
MODE14: DXM7.29 R120.1
MODE15: DXM8.28 R123.1
MODE16: DXM8.29 R122.1
MOSI: DXM1.23 JP2.8
MOSI1: DXM5.23 JP10.8
MOSI2: DXM2.23 JP4.8
MOSI3: DXM3.23 JP6.8
MOSI4: DXM4.23 JP8.8
MOSI5: DXM6.23 JP12.8
MOSI6: DXM7.23 JP14.8
MOSI7: DXM8.23 JP16.8
MS_CAN-H: JP1-OBD1.3 REL1.4
MS_CAN-H1: JP1-OBD5.3 REL5.4
MS_CAN-H2: JP1-OBD2.3 REL2.4
MS_CAN-H3: JP1-OBD3.3 REL3.4
MS_CAN-H4: JP1-OBD4.3 REL4.4
MS_CAN-H5: JP1-OBD6.3 REL6.4
MS_CAN-H6: JP1-OBD7.3 REL7.4
MS_CAN-H7: JP1-OBD8.3 REL8.4
MS_CAN-L: JP1-OBD1.4 REL1.5
MS_CAN-L1: JP1-OBD5.4 REL5.5
MS_CAN-L2: JP1-OBD2.4 REL2.5
MS_CAN-L3: JP1-OBD3.4 REL3.5
MS_CAN-L4: JP1-OBD4.4 REL4.5
MS_CAN-L5: JP1-OBD6.4 REL6.5
MS_CAN-L6: JP1-OBD7.4 REL7.5
MS_CAN-L7: JP1-OBD8.4 REL8.5
N$1: IC1.5 R22.1 R109.1
N$2: C7.1 IC1.3
N$3: C27.1 IC5.3
N$4: D2.AR R101.2
N$5: IC1.1 IC1.7 IC1.8 R9.1 R11.1
N$6: D2.AG R100.2
N$7: D1.K R1.1
N$8: D1.A DXM1.15
N$9: IC5.1 IC5.7 IC5.8 R37.1 R39.1
N$10: IC5.5 R50.1 R125.1
N$11: D14.AR R117.2
N$12: D14.AG R116.2
N$13: D13.K R29.1
N$14: D13.A DXM5.15
N$15: DXM5.17 R49.1 R124.2
N$16: R38.2 T13.1
N$17: DXM5.32 REL5.3
N$18: DXM5.31 REL5.6
N$19: DXM1.17 R21.1 R108.2
N$20: R10.2 T5.1
N$21: DXM1.32 REL1.3
N$22: DXM1.31 REL1.6
N$23: SG1.2 SG2.(-)LEAD T1.3
N$24: R2.2 T1.1
N$25: DXM1.12 R10.1
N$26: DXM1.13 R2.1
N$27: D9.A R21.2 REL1.8 T5.3
N$28: SG9.2 SG10.(-)LEAD T9.3
N$29: D101.3 IC1.2 L1.2
N$30: R30.2 T9.1
N$31: DXM5.12 R38.1
N$32: DXM5.13 R30.1
N$33: D21.A R49.2 REL5.8 T13.3
N$34: D109.3 IC5.2 L5.2
N$35: C11.1 IC2.3
N$36: IC2.1 IC2.7 IC2.8 R12.1 R14.1
N$37: IC2.5 R24.1 R111.1
N$38: D4.AR R103.2
N$39: D4.AG R102.2
N$40: D3.K R3.1
N$41: D3.A DXM2.15
N$42: DXM2.17 R23.1 R110.2
N$43: R13.2 T6.1
N$44: DXM2.32 REL2.3
N$45: DXM2.31 REL2.6
N$46: SG3.2 SG4.(-)LEAD T2.3
N$47: R4.2 T2.1
N$48: DXM2.12 R13.1
N$49: DXM2.13 R4.1
N$50: D10.A R23.2 REL2.8 T6.3
N$51: D103.3 IC2.2 L2.2
N$52: C15.1 IC3.3
N$53: IC3.1 IC3.7 IC3.8 R15.1 R17.1
N$54: IC3.5 R26.1 R113.1
N$55: D6.AR R105.2
N$56: D6.AG R104.2
N$57: D5.K R5.1
N$58: D5.A DXM3.15
N$59: DXM3.17 R25.1 R112.2
N$60: R16.2 T7.1
N$61: DXM3.32 REL3.3
N$62: DXM3.31 REL3.6
N$63: SG5.2 SG6.(-)LEAD T3.3
N$64: R6.2 T3.1
N$65: DXM3.12 R16.1
N$66: DXM3.13 R6.1
N$67: D11.A R25.2 REL3.8 T7.3
N$68: D105.3 IC3.2 L3.2
N$69: C19.1 IC4.3
N$70: IC4.1 IC4.7 IC4.8 R18.1 R20.1
N$71: IC4.5 R28.1 R115.1
N$72: D8.AR R107.2
N$73: D8.AG R106.2
N$74: D7.K R7.1
N$75: D7.A DXM4.15
N$76: DXM4.17 R27.1 R114.2
N$77: R19.2 T8.1
N$78: DXM4.32 REL4.3
N$79: DXM4.31 REL4.6
N$80: SG7.2 SG8.(-)LEAD T4.3
N$81: R8.2 T4.1
N$82: DXM4.12 R19.1
N$83: DXM4.13 R8.1
N$84: D12.A R27.2 REL4.8 T8.3
N$85: D107.3 IC4.2 L4.2
N$86: C31.1 IC6.3
N$87: IC6.1 IC6.7 IC6.8 R40.1 R42.1
N$88: IC6.5 R52.1 R127.1
N$89: D16.AR R119.2
N$90: D16.AG R118.2
N$91: D15.K R31.1
N$92: D15.A DXM6.15
N$93: DXM6.17 R51.1 R126.2
N$94: R41.2 T14.1
N$95: DXM6.32 REL6.3
N$96: DXM6.31 REL6.6
N$97: SG11.2 SG12.(-)LEAD T10.3
N$98: R32.2 T10.1
N$99: DXM6.12 R41.1
N$100: DXM6.13 R32.1
N$101: D22.A R51.2 REL6.8 T14.3
N$102: D111.3 IC6.2 L6.2
N$103: C35.1 IC7.3
N$104: IC7.1 IC7.7 IC7.8 R43.1 R45.1
N$105: IC7.5 R54.1 R129.1
N$106: D18.AR R121.2
N$107: D18.AG R120.2
N$108: D17.K R33.1
N$109: D17.A DXM7.15
N$110: DXM7.17 R53.1 R128.2
N$111: R44.2 T15.1
N$112: DXM7.32 REL7.3
N$113: DXM7.31 REL7.6
N$114: SG13.2 SG14.(-)LEAD T11.3
N$115: R34.2 T11.1
N$116: DXM7.12 R44.1
N$117: DXM7.13 R34.1
N$118: D23.A R53.2 REL7.8 T15.3
N$119: D113.3 IC7.2 L7.2
N$120: C39.1 IC8.3
N$121: IC8.1 IC8.7 IC8.8 R46.1 R48.1
N$122: IC8.5 R56.1 R131.1
N$123: D20.AR R123.2
N$124: D20.AG R122.2
N$125: D19.K R35.1
N$126: D19.A DXM8.15
N$127: DXM8.17 R55.1 R130.2
N$128: R47.2 T16.1
N$129: DXM8.32 REL8.3
N$130: DXM8.31 REL8.6
N$131: SG15.2 SG16.(-)LEAD T12.3
N$132: R36.2 T12.1
N$133: DXM8.12 R47.1
N$134: DXM8.13 R36.1
N$135: D24.A R55.2 REL8.8 T16.3
N$136: D115.3 IC8.2 L8.2
PWM+: DXM1.2 JP3-OBD1.3
PWM+1: DXM5.2 JP3-OBD5.3
PWM+2: DXM2.2 JP3-OBD2.3
PWM+3: DXM3.2 JP3-OBD3.3
PWM+4: DXM4.2 JP3-OBD4.3
PWM+5: DXM6.2 JP3-OBD6.3
PWM+6: DXM7.2 JP3-OBD7.3
PWM+7: DXM8.2 JP3-OBD8.3
PWM-: DXM1.3 JP3-OBD1.4
PWM-1: DXM5.3 JP3-OBD5.4
PWM-2: DXM2.3 JP3-OBD2.4
PWM-3: DXM3.3 JP3-OBD3.4
PWM-4: DXM4.3 JP3-OBD4.4
PWM-5: DXM6.3 JP3-OBD6.4
PWM-6: DXM7.3 JP3-OBD7.4
PWM-7: DXM8.3 JP3-OBD8.4
RESET-: DXM1.30 IC100.P$21 IC101.P$16 JP2.1
RESET-1: DXM5.30 IC108.P$21 IC109.P$16 JP10.1
RESET-2: DXM2.30 IC102.P$21 IC103.P$16 JP4.1
RESET-3: DXM3.30 IC104.P$21 IC105.P$16 JP6.1
RESET-4: DXM4.30 IC106.P$21 IC107.P$16 JP8.1
RESET-5: DXM6.30 IC110.P$21 IC111.P$16 JP12.1
RESET-6: DXM7.30 IC112.P$21 IC113.P$16 JP14.1
RESET-7: DXM8.30 IC114.P$21 IC115.P$16 JP16.1
RESETN: DXM1.11 JP1.4
RESETN1: DXM5.11 JP9.4
RESETN2: DXM2.11 JP3.4
RESETN3: DXM3.11 JP5.4
RESETN4: DXM4.11 JP7.4
RESETN5: DXM6.11 JP11.4
RESETN6: DXM7.11 JP13.4
RESETN7: DXM8.11 JP15.4
RF: BT-ANTENNA.RF IC101.P$37
RF1: BT-ANTENNA103.RF IC109.P$37
RF2: BT-ANTENNA100.RF IC103.P$37
RF3: BT-ANTENNA101.RF IC105.P$37
RF4: BT-ANTENNA102.RF IC107.P$37
RF5: BT-ANTENNA104.RF IC111.P$37
RF6: BT-ANTENNA105.RF IC113.P$37
RF7: BT-ANTENNA106.RF IC115.P$37
RTS: DXM1.27 JP2.7
RTS1: DXM5.27 JP10.7
RTS2: DXM2.27 JP4.7
RTS3: DXM3.27 JP6.7
RTS4: DXM4.27 JP8.7
RTS5: DXM6.27 JP12.7
RTS6: DXM7.27 JP14.7
RTS7: DXM8.27 JP16.7
RX: IC100.P$10 IC101.P$26 JP1.5
RX1: IC108.P$10 IC109.P$26 JP9.5
RX2: IC102.P$10 IC103.P$26 JP3.5
RX3: IC104.P$10 IC105.P$26 JP5.5
RX4: IC106.P$10 IC107.P$26 JP7.5
RX5: IC110.P$10 IC111.P$26 JP11.5
RX6: IC112.P$10 IC113.P$26 JP13.5
RX7: IC114.P$10 IC115.P$26 JP15.5
RXD: DXM1.25 JP1.8
RXD1: DXM5.25 JP9.8
RXD2: DXM2.25 JP3.8
RXD3: DXM3.25 JP5.8
RXD4: DXM4.25 JP7.8
RXD5: DXM6.25 JP11.8
RXD6: DXM7.25 JP13.8
RXD7: DXM8.25 JP15.8
SCK: DXM1.20 JP2.4
SCK1: DXM5.20 JP10.4
SCK2: DXM2.20 JP4.4
SCK3: DXM3.20 JP6.4
SCK4: DXM4.20 JP8.4
SCK5: DXM6.20 JP12.4
SCK6: DXM7.20 JP14.4
SCK7: DXM8.20 JP16.4
TX: IC100.P$9 IC101.P$27 JP1.7
TX1: IC108.P$9 IC109.P$27 JP9.7
TX2: IC102.P$9 IC103.P$27 JP3.7
TX3: IC104.P$9 IC105.P$27 JP5.7
TX4: IC106.P$9 IC107.P$27 JP7.7
TX5: IC110.P$9 IC111.P$27 JP11.7
TX6: IC112.P$9 IC113.P$27 JP13.7
TX7: IC114.P$9 IC115.P$27 JP15.7
TXD: DXM1.24 JP1.6
TXD1: DXM5.24 JP9.6
TXD2: DXM2.24 JP3.6
TXD3: DXM3.24 JP5.6
TXD4: DXM4.24 JP7.6
TXD5: DXM6.24 JP11.6
TXD6: DXM7.24 JP13.6
TXD7: DXM8.24 JP15.6

## Tracks (layer width: path | path; a pad name or v marks a point on that pad's centre or on a via)
12V_DOUT  (via drill 0.61)
  Top 0.254: 16.25,62.7 C5.1 | 25.14,63.02 R9.2 25.45,63.02 | 27.2,63.02 R11.2 27.36,62.86
  Top 0.61: C8.+ 31.33,68.41 32.12,68.41 v32.12,65.24 32.12,64.76 32.12,63.18 31.8,62.86 27.36,62.86 | 16.25,62.7 16.25,63.81 v16.41,63.97 | 25.14,63.02 20.69,67.46 v16.41,67.46 15.13,67.46 14.5,68.1 14.5,70.8 14.5,88.1 v14.5,93.66 | 27.2,63.02 25.45,63.02 | v13.07,96.36 12.91,96.36 7.04,96.36 DXM1.1 | v21.01,60.8 21.01,56.51 IC1.6
  Bottom 0.254: D100.C 31.01,56.83 | v16.41,67.46 16.56,67.3
  Bottom 0.61: 31.01,56.83 31.01,57.94 29.74,59.21 29.11,59.84 29.11,60 29.11,62.7 29.26,62.86 29.74,63.34 29.9,63.34 30.22,63.34 v32.12,65.24 | v16.41,67.46 v16.41,63.97 17.2,63.97 18.15,63.02 | v14.5,93.66 13.07,95.08 13.07,95.24 v13.07,96.36 | v21.01,60.8 21.01,61.59 20.21,62.38 18.79,62.38 18.15,63.02 | 18.15,63.02 17.68,63.49 18.15,63.02
12V_DOUT1  (via drill 0.61)
  Top 0.254: 16.25,12.7 C25.1 | 25.14,13.02 R37.2 25.45,13.02 | 27.2,13.02 R39.2 27.36,12.86
  Top 0.61: C28.+ 31.33,18.41 32.12,18.41 v32.12,15.24 32.12,14.76 32.12,13.18 31.8,12.86 27.36,12.86 | 16.25,12.7 16.25,13.81 v16.41,13.97 | 25.14,13.02 20.69,17.46 v16.41,17.46 15.13,17.46 14.5,18.1 14.5,20.8 14.5,38.1 v14.5,43.66 | 27.2,13.02 25.45,13.02 | v13.07,46.36 12.91,46.36 7.04,46.36 DXM5.1 | v21.01,10.79 21.01,6.51 IC5.6
  Bottom 0.254: D108.C 31.01,6.83 | v16.41,17.46 16.56,17.3
  Bottom 0.61: 31.01,6.83 31.01,7.94 29.74,9.21 29.11,9.84 29.11,10 29.11,12.7 29.26,12.86 29.74,13.34 29.9,13.34 30.22,13.34 v32.12,15.24 | v16.41,17.46 v16.41,13.97 17.2,13.97 18.15,13.02 | v14.5,43.66 13.07,45.09 13.07,45.24 v13.07,46.36 | v21.01,10.79 21.01,11.59 20.21,12.38 18.79,12.38 18.15,13.02 | 18.15,13.02 17.68,13.49 18.15,13.02
12V_DOUT2  (via drill 0.61)
  Top 0.254: 56.25,62.7 C9.1 | 65.14,63.02 R12.2 65.45,63.02 | 67.2,63.02 R14.2 67.36,62.86
  Top 0.61: C12.+ 71.33,68.41 72.12,68.41 v72.12,65.24 72.12,64.76 72.12,63.18 71.8,62.86 67.36,62.86 | 56.25,62.7 56.25,63.81 v56.41,63.97 | 65.14,63.02 60.69,67.46 v56.41,67.46 55.13,67.46 54.5,68.1 54.5,70.8 54.5,88.1 v54.5,93.66 | 67.2,63.02 65.45,63.02 | v53.07,96.36 52.91,96.36 47.04,96.36 DXM2.1 | v61.01,60.8 61.01,56.51 IC2.6
  Bottom 0.254: D102.C 71.01,56.83 | v56.41,67.46 56.56,67.3
  Bottom 0.61: 71.01,56.83 71.01,57.94 69.74,59.21 69.11,59.84 69.11,60 69.11,62.7 69.26,62.86 69.74,63.34 69.9,63.34 70.22,63.34 v72.12,65.24 | v56.41,67.46 v56.41,63.97 57.2,63.97 58.15,63.02 | v54.5,93.66 53.07,95.08 53.07,95.24 v53.07,96.36 | v61.01,60.8 61.01,61.59 60.22,62.38 58.79,62.38 58.15,63.02 | 58.15,63.02 57.67,63.49 58.15,63.02
12V_DOUT3  (via drill 0.61)
  Top 0.254: 96.25,62.7 C13.1 | 105.14,63.02 R15.2 105.45,63.02 | 107.2,63.02 R17.2 107.36,62.86
  Top 0.61: C16.+ 111.33,68.41 112.12,68.41 v112.12,65.24 112.12,64.76 112.12,63.18 111.8,62.86 107.36,62.86 | 96.25,62.7 96.25,63.81 v96.41,63.97 | 105.14,63.02 100.69,67.46 v96.41,67.46 95.14,67.46 94.5,68.1 94.5,70.8 94.5,88.1 v94.5,93.66 | 107.2,63.02 105.45,63.02 | v93.07,96.36 92.91,96.36 87.04,96.36 DXM3.1 | v101.01,60.8 101.01,56.51 IC3.6
  Bottom 0.254: D104.C 111.01,56.83 | v96.41,67.46 96.56,67.3
  Bottom 0.61: 111.01,56.83 111.01,57.94 109.74,59.21 109.11,59.84 109.11,60 109.11,62.7 109.26,62.86 109.74,63.34 109.9,63.34 110.22,63.34 v112.12,65.24 | v96.41,67.46 v96.41,63.97 97.2,63.97 98.15,63.02 | v94.5,93.66 93.07,95.08 93.07,95.24 v93.07,96.36 | v101.01,60.8 101.01,61.59 100.22,62.38 98.79,62.38 98.15,63.02 | 98.15,63.02 97.67,63.49 98.15,63.02
12V_DOUT4  (via drill 0.61)
  Top 0.254: 136.25,62.7 C17.1 | 145.14,63.02 R18.2 145.45,63.02 | 147.2,63.02 R20.2 147.36,62.86
  Top 0.61: C20.+ 151.33,68.41 152.12,68.41 v152.12,65.24 152.12,64.76 152.12,63.18 151.8,62.86 147.36,62.86 | 136.25,62.7 136.25,63.81 v136.41,63.97 | 145.14,63.02 140.69,67.46 v136.41,67.46 135.13,67.46 134.5,68.1 134.5,70.8 134.5,88.1 v134.5,93.66 | 147.2,63.02 145.45,63.02 | v133.07,96.36 132.91,96.36 127.04,96.36 DXM4.1 | v141.01,60.8 141.01,56.51 IC4.6
  Bottom 0.254: D106.C 151.01,56.83 | v136.41,67.46 136.56,67.3
  Bottom 0.61: 151.01,56.83 151.01,57.94 149.74,59.21 149.1,59.84 149.1,60 149.1,62.7 149.26,62.86 149.74,63.34 149.9,63.34 150.22,63.34 v152.12,65.24 | v136.41,67.46 v136.41,63.97 137.2,63.97 138.15,63.02 | v134.5,93.66 133.07,95.08 133.07,95.24 v133.07,96.36 | v141.01,60.8 141.01,61.59 140.22,62.38 138.79,62.38 138.15,63.02 | 138.15,63.02 137.68,63.49 138.15,63.02
12V_DOUT5  (via drill 0.61)
  Top 0.254: 56.25,12.7 C29.1 | 65.14,13.02 R40.2 65.45,13.02 | 67.2,13.02 R42.2 67.36,12.86
  Top 0.61: C32.+ 71.33,18.41 72.12,18.41 v72.12,15.24 72.12,14.76 72.12,13.18 71.8,12.86 67.36,12.86 | 56.25,12.7 56.25,13.81 v56.41,13.97 | 65.14,13.02 60.69,17.46 v56.41,17.46 55.13,17.46 54.5,18.1 54.5,20.8 54.5,38.1 v54.5,43.66 | 67.2,13.02 65.45,13.02 | v53.07,46.36 52.91,46.36 47.04,46.36 DXM6.1 | v61.01,10.79 61.01,6.51 IC6.6
  Bottom 0.254: D110.C 71.01,6.83 | v56.41,17.46 56.56,17.3
  Bottom 0.61: 71.01,6.83 71.01,7.94 69.74,9.21 69.11,9.84 69.11,10 69.11,12.7 69.26,12.86 69.74,13.34 69.9,13.34 70.22,13.34 v72.12,15.24 | v56.41,17.46 v56.41,13.97 57.2,13.97 58.15,13.02 | v54.5,43.66 53.07,45.09 53.07,45.24 v53.07,46.36 | v61.01,10.79 61.01,11.59 60.22,12.38 58.79,12.38 58.15,13.02 | 58.15,13.02 57.67,13.49 58.15,13.02
12V_DOUT6  (via drill 0.61)
  Top 0.254: 96.25,12.7 C33.1 | 105.14,13.02 R43.2 105.45,13.02 | 107.2,13.02 R45.2 107.36,12.86
  Top 0.61: C36.+ 111.33,18.41 112.12,18.41 v112.12,15.24 112.12,14.76 112.12,13.18 111.8,12.86 107.36,12.86 | 96.25,12.7 96.25,13.81 v96.41,13.97 | 105.14,13.02 100.69,17.46 v96.41,17.46 95.14,17.46 94.5,18.1 94.5,20.8 94.5,38.1 v94.5,43.66 | 107.2,13.02 105.45,13.02 | v93.07,46.36 92.91,46.36 87.04,46.36 DXM7.1 | v101.01,10.79 101.01,6.51 IC7.6
  Bottom 0.254: D112.C 111.01,6.83 | v96.41,17.46 96.56,17.3
  Bottom 0.61: 111.01,6.83 111.01,7.94 109.74,9.21 109.11,9.84 109.11,10 109.11,12.7 109.26,12.86 109.74,13.34 109.9,13.34 110.22,13.34 v112.12,15.24 | v96.41,17.46 v96.41,13.97 97.2,13.97 98.15,13.02 | v94.5,43.66 93.07,45.09 93.07,45.24 v93.07,46.36 | v101.01,10.79 101.01,11.59 100.22,12.38 98.79,12.38 98.15,13.02 | 98.15,13.02 97.67,13.49 98.15,13.02
12V_DOUT7  (via drill 0.61)
  Top 0.254: 136.25,12.7 C37.1 | 145.14,13.02 R46.2 145.45,13.02 | 147.2,13.02 R48.2 147.36,12.86
  Top 0.61: C40.+ 151.33,18.41 152.12,18.41 v152.12,15.24 152.12,14.76 152.12,13.18 151.8,12.86 147.36,12.86 | 136.25,12.7 136.25,13.81 v136.41,13.97 | 145.14,13.02 140.69,17.46 v136.41,17.46 135.13,17.46 134.5,18.1 134.5,20.8 134.5,38.1 v134.5,43.66 | 147.2,13.02 145.45,13.02 | v133.07,46.36 132.91,46.36 127.04,46.36 DXM8.1 | v141.01,10.79 141.01,6.51 IC8.6
  Bottom 0.254: D114.C 151.01,6.83 | v136.41,17.46 136.56,17.3
  Bottom 0.61: 151.01,6.83 151.01,7.94 149.74,9.21 149.1,9.84 149.1,10 149.1,12.7 149.26,12.86 149.74,13.34 149.9,13.34 150.22,13.34 v152.12,15.24 | v136.41,17.46 v136.41,13.97 137.2,13.97 138.15,13.02 | v134.5,43.66 133.07,45.09 133.07,45.24 v133.07,46.36 | v141.01,10.79 141.01,11.59 140.22,12.38 138.79,12.38 138.15,13.02 | 138.15,13.02 137.68,13.49 138.15,13.02
+3V1  (via drill 0.61)
  Top 0.254: 17.04,9.84 17.04,7.94 | 16.25,10.64 C26.1 16.09,10.64 | 17.68,7.3 R50.2 | 6.88,21.43 DXM5.14
  Top 0.406: 16.25,10.64 17.04,9.84 | 17.04,7.94 17.68,7.3 | 16.09,10.64 13.55,10.64 11.32,8.41 L5.1 | v5.13,21.43 6.88,21.43 | C21.+ 33.23,23.5 v32.76,23.97 | v24.66,36.83 24.66,25.24 v21.17,21.75
  Bottom 0.254: IC109.P$2 27.2,40.48 | 27.04,20.32 IC109.P$17 27.2,20.48 | 24.82,19.05 IC108.P$14 | 9.58,17.62 IC108.P$16
  Bottom 0.406: 27.2,40.48 30.38,43.66 30.38,44.29 JP9.1 | 27.04,20.32 26.57,20.32 25.3,19.05 24.82,19.05 | 9.58,17.62 10.85,17.62 11.48,16.99 12.75,16.99 15.29,19.53 19.1,19.53 19.58,19.05 20.69,19.05 | IC108.P$14 24.02,18.89 v21.17,21.75 | v21.17,21.75 | v21.17,21.75 | 21.17,19.53 20.69,19.05 | IC108.P$16 8.79,17.78 v5.13,21.43 4.34,21.43 3.86,20.95 3.86,19.21 7.51,15.56 7.51,10.64 11.17,6.98 L5.1 | v32.76,23.97 31.17,23.97 27.68,20.48 27.2,20.48 | v24.66,36.83 24.66,38.89 26.25,40.48 27.04,40.48 IC109.P$2 | 21.17,19.53 20.69,19.05 | v21.17,21.75 21.17,19.53 | v21.17,21.75 | 21.17,19.53 20.69,19.05 | 21.17,19.53 v21.17,21.75
+3V2  (via drill 0.61)
  Top 0.254: 57.04,59.84 57.04,57.94 | 56.25,60.64 C10.1 56.09,60.64 | 57.67,57.3 R24.2 | 46.88,71.43 DXM2.14
  Top 0.406: 56.25,60.64 57.04,59.84 | 57.04,57.94 57.67,57.3 | 56.09,60.64 53.55,60.64 51.33,58.41 L2.1 | v45.13,71.43 46.88,71.43 | C2.+ 73.23,73.5 v72.76,73.97 | v64.66,86.83 64.66,75.24 v61.17,71.75
  Bottom 0.254: IC103.P$2 67.2,90.48 | 67.04,70.32 IC103.P$17 67.2,70.48 | 64.82,69.05 IC102.P$14 | 49.58,67.62 IC102.P$16
  Bottom 0.406: 67.2,90.48 70.38,93.66 70.38,94.29 JP3.1 | 67.04,70.32 66.56,70.32 65.3,69.05 64.82,69.05 | 49.58,67.62 50.85,67.62 51.48,66.99 52.75,66.99 55.29,69.53 59.1,69.53 59.58,69.05 60.69,69.05 | IC102.P$14 64.03,68.89 v61.17,71.75 | v61.17,71.75 | v61.17,71.75 | 61.17,69.53 60.69,69.05 | IC102.P$16 48.78,67.78 v45.13,71.43 44.34,71.43 43.86,70.95 43.86,69.21 47.52,65.56 47.52,60.64 51.17,56.98 L2.1 | v72.76,73.97 71.17,73.97 67.68,70.48 67.2,70.48 | v64.66,86.83 64.66,88.89 66.25,90.48 67.04,90.48 IC103.P$2 | 61.17,69.53 60.69,69.05 | v61.17,71.75 61.17,69.53 | v61.17,71.75 | 61.17,69.53 60.69,69.05 | 61.17,69.53 v61.17,71.75
+3V3  (via drill 0.61)
  Top 0.254: 17.04,59.84 17.04,57.94 | 16.25,60.64 C6.1 16.09,60.64 | 17.68,57.3 R22.2 | 6.88,71.43 DXM1.14
  Top 0.406: 16.25,60.64 17.04,59.84 | 17.04,57.94 17.68,57.3 | 16.09,60.64 13.55,60.64 11.32,58.41 L1.1 | v5.13,71.43 6.88,71.43 | C1.+ 33.23,73.5 v32.76,73.97 | v24.66,86.83 24.66,75.24 v21.17,71.75
  Bottom 0.254: IC101.P$2 27.2,90.48 | 27.04,70.32 IC101.P$17 27.2,70.48 | 24.82,69.05 IC100.P$14 | 9.58,67.62 IC100.P$16
  Bottom 0.406: 27.2,90.48 30.38,93.66 30.38,94.29 JP1.1 | 27.04,70.32 26.57,70.32 25.3,69.05 24.82,69.05 | 9.58,67.62 10.85,67.62 11.48,66.99 12.75,66.99 15.29,69.53 19.1,69.53 19.58,69.05 20.69,69.05 | IC100.P$14 24.02,68.89 v21.17,71.75 | v21.17,71.75 | v21.17,71.75 | 21.17,69.53 20.69,69.05 | IC100.P$16 8.79,67.78 v5.13,71.43 4.34,71.43 3.86,70.95 3.86,69.21 7.51,65.56 7.51,60.64 11.17,56.98 L1.1 | v32.76,73.97 31.17,73.97 27.68,70.48 27.2,70.48 | v24.66,86.83 24.66,88.89 26.25,90.48 27.04,90.48 IC101.P$2 | 21.17,69.53 20.69,69.05 | v21.17,71.75 21.17,69.53 | v21.17,71.75 | 21.17,69.53 20.69,69.05 | 21.17,69.53 v21.17,71.75
+3V4  (via drill 0.61)
  Top 0.254: 97.04,59.84 97.04,57.94 | 96.25,60.64 C14.1 96.09,60.64 | 97.67,57.3 R26.2 | 86.88,71.43 DXM3.14
  Top 0.406: 96.25,60.64 97.04,59.84 | 97.04,57.94 97.67,57.3 | 96.09,60.64 93.55,60.64 91.33,58.41 L3.1 | v85.13,71.43 86.88,71.43 | C3.+ 113.23,73.5 v112.76,73.97 | v104.66,86.83 104.66,75.24 v101.17,71.75
  Bottom 0.254: IC105.P$2 107.2,90.48 | 107.04,70.32 IC105.P$17 107.2,70.48 | 104.82,69.05 IC104.P$14 | 89.58,67.62 IC104.P$16
  Bottom 0.406: 107.2,90.48 110.38,93.66 110.38,94.29 JP5.1 | 107.04,70.32 106.56,70.32 105.3,69.05 104.82,69.05 | 89.58,67.62 90.85,67.62 91.48,66.99 92.75,66.99 95.29,69.53 99.1,69.53 99.58,69.05 100.69,69.05 | IC104.P$14 104.03,68.89 v101.17,71.75 | v101.17,71.75 | v101.17,71.75 | 101.17,69.53 100.69,69.05 | IC104.P$16 88.78,67.78 v85.13,71.43 84.34,71.43 83.86,70.95 83.86,69.21 87.52,65.56 87.52,60.64 91.17,56.98 L3.1 | v112.76,73.97 111.17,73.97 107.68,70.48 107.2,70.48 | v104.66,86.83 104.66,88.89 106.25,90.48 107.04,90.48 IC105.P$2 | 101.17,69.53 100.69,69.05 | v101.17,71.75 101.17,69.53 | v101.17,71.75 | 101.17,69.53 100.69,69.05 | 101.17,69.53 v101.17,71.75
+3V5  (via drill 0.61)
  Top 0.254: 137.04,59.84 137.04,57.94 | 136.25,60.64 C18.1 136.09,60.64 | 137.68,57.3 R28.2 | 126.88,71.43 DXM4.14
  Top 0.406: 136.25,60.64 137.04,59.84 | 137.04,57.94 137.68,57.3 | 136.09,60.64 133.55,60.64 131.32,58.41 L4.1 | v125.13,71.43 126.88,71.43 | C4.+ 153.23,73.5 v152.76,73.97 | v144.66,86.83 144.66,75.24 v141.17,71.75
  Bottom 0.254: IC107.P$2 147.2,90.48 | 147.04,70.32 IC107.P$17 147.2,70.48 | 144.82,69.05 IC106.P$14 | 129.58,67.62 IC106.P$16
  Bottom 0.406: 147.2,90.48 150.38,93.66 150.38,94.29 JP7.1 | 147.04,70.32 146.56,70.32 145.29,69.05 144.82,69.05 | 129.58,67.62 130.85,67.62 131.48,66.99 132.75,66.99 135.29,69.53 139.1,69.53 139.58,69.05 140.69,69.05 | IC106.P$14 144.03,68.89 v141.17,71.75 | v141.17,71.75 | v141.17,71.75 | 141.17,69.53 140.69,69.05 | IC106.P$16 128.78,67.78 v125.13,71.43 124.34,71.43 123.86,70.95 123.86,69.21 127.52,65.56 127.52,60.64 131.17,56.98 L4.1 | v152.76,73.97 151.17,73.97 147.68,70.48 147.2,70.48 | v144.66,86.83 144.66,88.89 146.25,90.48 147.04,90.48 IC107.P$2 | 141.17,69.53 140.69,69.05 | v141.17,71.75 141.17,69.53 | v141.17,71.75 | 141.17,69.53 140.69,69.05 | 141.17,69.53 v141.17,71.75
+3V6  (via drill 0.61)
  Top 0.254: 57.04,9.84 57.04,7.94 | 56.25,10.64 C30.1 56.09,10.64 | 57.67,7.3 R52.2 | 46.88,21.43 DXM6.14
  Top 0.406: 56.25,10.64 57.04,9.84 | 57.04,7.94 57.67,7.3 | 56.09,10.64 53.55,10.64 51.33,8.41 L6.1 | v45.13,21.43 46.88,21.43 | C22.+ 73.23,23.5 v72.76,23.97 | v64.66,36.83 64.66,25.24 v61.17,21.75
  Bottom 0.254: IC111.P$2 67.2,40.48 | 67.04,20.32 IC111.P$17 67.2,20.48 | 64.82,19.05 IC110.P$14 | 49.58,17.62 IC110.P$16
  Bottom 0.406: 67.2,40.48 70.38,43.66 70.38,44.29 JP11.1 | 67.04,20.32 66.56,20.32 65.3,19.05 64.82,19.05 | 49.58,17.62 50.85,17.62 51.48,16.99 52.75,16.99 55.29,19.53 59.1,19.53 59.58,19.05 60.69,19.05 | IC110.P$14 64.03,18.89 v61.17,21.75 | v61.17,21.75 | v61.17,21.75 | 61.17,19.53 60.69,19.05 | IC110.P$16 48.78,17.78 v45.13,21.43 44.34,21.43 43.86,20.95 43.86,19.21 47.52,15.56 47.52,10.64 51.17,6.98 L6.1 | v72.76,23.97 71.17,23.97 67.68,20.48 67.2,20.48 | v64.66,36.83 64.66,38.89 66.25,40.48 67.04,40.48 IC111.P$2 | 61.17,19.53 60.69,19.05 | v61.17,21.75 61.17,19.53 | v61.17,21.75 | 61.17,19.53 60.69,19.05 | 61.17,19.53 v61.17,21.75
+3V7  (via drill 0.61)
  Top 0.254: 97.04,9.84 97.04,7.94 | 96.25,10.64 C34.1 96.09,10.64 | 97.67,7.3 R54.2 | 86.88,21.43 DXM7.14
  Top 0.406: 96.25,10.64 97.04,9.84 | 97.04,7.94 97.67,7.3 | 96.09,10.64 93.55,10.64 91.33,8.41 L7.1 | v85.13,21.43 86.88,21.43 | C23.+ 113.23,23.5 v112.76,23.97 | v104.66,36.83 104.66,25.24 v101.17,21.75
  Bottom 0.254: IC113.P$2 107.2,40.48 | 107.04,20.32 IC113.P$17 107.2,20.48 | 104.82,19.05 IC112.P$14 | 89.58,17.62 IC112.P$16
  Bottom 0.406: 107.2,40.48 110.38,43.66 110.38,44.29 JP13.1 | 107.04,20.32 106.56,20.32 105.3,19.05 104.82,19.05 | 89.58,17.62 90.85,17.62 91.48,16.99 92.75,16.99 95.29,19.53 99.1,19.53 99.58,19.05 100.69,19.05 | IC112.P$14 104.03,18.89 v101.17,21.75 | v101.17,21.75 | v101.17,21.75 | 101.17,19.53 100.69,19.05 | IC112.P$16 88.78,17.78 v85.13,21.43 84.34,21.43 83.86,20.95 83.86,19.21 87.52,15.56 87.52,10.64 91.17,6.98 L7.1 | v112.76,23.97 111.17,23.97 107.68,20.48 107.2,20.48 | v104.66,36.83 104.66,38.89 106.25,40.48 107.04,40.48 IC113.P$2 | 101.17,19.53 100.69,19.05 | v101.17,21.75 101.17,19.53 | v101.17,21.75 | 101.17,19.53 100.69,19.05 | 101.17,19.53 v101.17,21.75
+3V8  (via drill 0.61)
  Top 0.254: 137.04,9.84 137.04,7.94 | 136.25,10.64 C38.1 136.09,10.64 | 137.68,7.3 R56.2 | 126.88,21.43 DXM8.14
  Top 0.406: 136.25,10.64 137.04,9.84 | 137.04,7.94 137.68,7.3 | 136.09,10.64 133.55,10.64 131.32,8.41 L8.1 | v125.13,21.43 126.88,21.43 | C24.+ 153.23,23.5 v152.76,23.97 | v144.66,36.83 144.66,25.24 v141.17,21.75
  Bottom 0.254: IC115.P$2 147.2,40.48 | 147.04,20.32 IC115.P$17 147.2,20.48 | 144.82,19.05 IC114.P$14 | 129.58,17.62 IC114.P$16
  Bottom 0.406: 147.2,40.48 150.38,43.66 150.38,44.29 JP15.1 | 147.04,20.32 146.56,20.32 145.29,19.05 144.82,19.05 | 129.58,17.62 130.85,17.62 131.48,16.99 132.75,16.99 135.29,19.53 139.1,19.53 139.58,19.05 140.69,19.05 | IC114.P$14 144.03,18.89 v141.17,21.75 | v141.17,21.75 | v141.17,21.75 | 141.17,19.53 140.69,19.05 | IC114.P$16 128.78,17.78 v125.13,21.43 124.34,21.43 123.86,20.95 123.86,19.21 127.52,15.56 127.52,10.64 131.17,6.98 L8.1 | v152.76,23.97 151.17,23.97 147.68,20.48 147.2,20.48 | v144.66,36.83 144.66,38.89 146.25,40.48 147.04,40.48 IC115.P$2 | 141.17,19.53 140.69,19.05 | v141.17,21.75 141.17,19.53 | v141.17,21.75 | 141.17,19.53 140.69,19.05 | 141.17,19.53 v141.17,21.75
+12V  (via drill 0.61)
  Top 0.254: 6.56,57.14 SG2.(+)LEAD 6.72,57.14 | 3.86,57.46 SG1.1
  Top 0.61: 6.56,57.14 4.18,57.14 3.86,57.46 | 37.52,56.35 37.52,54.92 37.52,53.02 36.57,52.22 D9.C | 37.52,56.35 REL1.1 37.52,56.35 | v34.34,65.24 37.04,65.24 37.52,64.76 37.52,60.64 | 37.52,60.64 37.52,57.94 37.52,56.35 | v26.88,57.62 27.2,57.46 28.79,57.46 30.69,57.46 33.87,60.64 37.52,60.64 | 6.72,57.14 6.56,57.3 6.56,59.21 8.47,61.11 v8.47,63.02 | v9.74,60 9.1,59.37 9.1,55.72 10.05,54.76 13.55,54.76 JP2-OBD1.4
  Bottom 0.61: v34.34,65.24 31.17,62.06 31.17,61.11 D100.A | v26.88,57.62 25.45,56.19 18.95,56.19 15.77,53.02 JP2-OBD1.4 | v8.47,63.02 8.47,61.27 v9.74,60
+12V1  (via drill 0.61)
  Top 0.254: 6.56,7.14 SG10.(+)LEAD 6.72,7.14 | 3.86,7.46 SG9.1
  Top 0.61: 6.56,7.14 4.18,7.14 3.86,7.46 | 37.52,6.35 37.52,4.92 37.52,3.02 36.57,2.22 D21.C | 37.52,6.35 REL5.1 37.52,6.35 | v34.34,15.24 37.04,15.24 37.52,14.76 37.52,10.64 | 37.52,10.64 37.52,7.94 37.52,6.35 | v26.88,7.62 27.2,7.46 28.79,7.46 30.69,7.46 33.87,10.64 37.52,10.64 | 6.72,7.14 6.56,7.3 6.56,9.21 8.47,11.11 v8.47,13.02 | v8.47,13.02 | v9.74,10 9.1,9.37 9.1,5.71 10.05,4.76 13.55,4.76 JP2-OBD5.4
  Bottom 0.61: v34.34,15.24 31.17,12.06 31.17,11.11 D108.A | v26.88,7.62 25.45,6.19 18.95,6.19 15.77,3.02 JP2-OBD5.4 | v8.47,13.02 8.47,11.27 v9.74,10
+12V2  (via drill 0.61)
  Top 0.254: 46.56,57.14 SG4.(+)LEAD 46.72,57.14 | 43.86,57.46 SG3.1
  Top 0.61: 46.56,57.14 44.18,57.14 43.86,57.46 | 77.52,56.35 77.52,54.92 77.52,53.02 76.57,52.22 D10.C | 77.52,56.35 REL2.1 77.52,56.35 | v74.34,65.24 77.04,65.24 77.52,64.76 77.52,60.64 | 77.52,60.64 77.52,57.94 77.52,56.35 | v66.88,57.62 67.2,57.46 68.79,57.46 70.69,57.46 73.87,60.64 77.52,60.64 | 46.72,57.14 46.56,57.3 46.56,59.21 48.47,61.11 v48.47,63.02 | v49.74,60 49.1,59.37 49.1,55.72 50.05,54.76 53.55,54.76 JP2-OBD2.4
  Bottom 0.61: v74.34,65.24 71.17,62.06 71.17,61.11 D102.A | v66.88,57.62 65.45,56.19 58.95,56.19 55.77,53.02 JP2-OBD2.4 | v48.47,63.02 48.47,61.27 v49.74,60
+12V3  (via drill 0.61)
  Top 0.254: 86.56,57.14 SG6.(+)LEAD 86.72,57.14 | 83.86,57.46 SG5.1
  Top 0.61: 86.56,57.14 84.18,57.14 83.86,57.46 | 117.52,56.35 117.52,54.92 117.52,53.02 116.57,52.22 D11.C | 117.52,56.35 REL3.1 117.52,56.35 | v114.34,65.24 117.04,65.24 117.52,64.76 117.52,60.64 | 117.52,60.64 117.52,57.94 117.52,56.35 | v106.88,57.62 107.2,57.46 108.79,57.46 110.69,57.46 113.87,60.64 117.52,60.64 | 86.72,57.14 86.56,57.3 86.56,59.21 88.47,61.11 v88.47,63.02 | v89.74,60 89.1,59.37 89.1,55.72 90.06,54.76 93.55,54.76 JP2-OBD3.4
  Bottom 0.61: v114.34,65.24 111.17,62.06 111.17,61.11 D104.A | v106.88,57.62 105.45,56.19 98.94,56.19 95.77,53.02 JP2-OBD3.4 | v88.47,63.02 88.47,61.27 v89.74,60
+12V4  (via drill 0.61)
  Top 0.254: 126.56,57.14 SG8.(+)LEAD 126.72,57.14 | 123.86,57.46 SG7.1
  Top 0.61: 126.56,57.14 124.18,57.14 123.86,57.46 | 157.52,56.35 157.52,54.92 157.52,53.02 156.57,52.22 D12.C | 157.52,56.35 REL4.1 157.52,56.35 | v154.34,65.24 157.04,65.24 157.52,64.76 157.52,60.64 | 157.52,60.64 157.52,57.94 157.52,56.35 | v146.88,57.62 147.2,57.46 148.79,57.46 150.69,57.46 153.87,60.64 157.52,60.64 | 126.72,57.14 126.56,57.3 126.56,59.21 128.47,61.11 v128.47,63.02 | v129.74,60 129.1,59.37 129.1,55.72 130.06,54.76 133.55,54.76 JP2-OBD4.4
  Bottom 0.61: v154.34,65.24 151.17,62.06 151.17,61.11 D106.A | v146.88,57.62 145.45,56.19 138.94,56.19 135.77,53.02 JP2-OBD4.4 | v128.47,63.02 128.47,61.27 v129.74,60
+12V5  (via drill 0.61)
  Top 0.254: 46.56,7.14 SG12.(+)LEAD 46.72,7.14 | 43.86,7.46 SG11.1
  Top 0.61: 46.56,7.14 44.18,7.14 43.86,7.46 | 77.52,6.35 77.52,4.92 77.52,3.02 76.57,2.22 D22.C | 77.52,6.35 REL6.1 77.52,6.35 | v74.34,15.24 77.04,15.24 77.52,14.76 77.52,10.64 | 77.52,10.64 77.52,7.94 77.52,6.35 | v66.88,7.62 67.2,7.46 68.79,7.46 70.69,7.46 73.87,10.64 77.52,10.64 | 46.72,7.14 46.56,7.3 46.56,9.21 48.47,11.11 v48.47,13.02 | v48.47,13.02 | v49.74,10 49.1,9.37 49.1,5.71 50.05,4.76 53.55,4.76 JP2-OBD6.4
  Bottom 0.61: v74.34,15.24 71.17,12.06 71.17,11.11 D110.A | v66.88,7.62 65.45,6.19 58.95,6.19 55.77,3.02 JP2-OBD6.4 | v48.47,13.02 48.47,11.27 v49.74,10
+12V6  (via drill 0.61)
  Top 0.254: 86.56,7.14 SG14.(+)LEAD 86.72,7.14 | 83.86,7.46 SG13.1
  Top 0.61: 86.56,7.14 84.18,7.14 83.86,7.46 | 117.52,6.35 117.52,4.92 117.52,3.02 116.57,2.22 D23.C | 117.52,6.35 REL7.1 117.52,6.35 | v114.34,15.24 117.04,15.24 117.52,14.76 117.52,10.64 | 117.52,10.64 117.52,7.94 117.52,6.35 | v106.88,7.62 107.2,7.46 108.79,7.46 110.69,7.46 113.87,10.64 117.52,10.64 | 86.72,7.14 86.56,7.3 86.56,9.21 88.47,11.11 v88.47,13.02 | v88.47,13.02 | v89.74,10 89.1,9.37 89.1,5.71 90.06,4.76 93.55,4.76 JP2-OBD7.4
  Bottom 0.61: v114.34,15.24 111.17,12.06 111.17,11.11 D112.A | v106.88,7.62 105.45,6.19 98.94,6.19 95.77,3.02 JP2-OBD7.4 | v88.47,13.02 88.47,11.27 v89.74,10
+12V7  (via drill 0.61)